# Altium PCB ESP32Break_PCB.PcbDoc
Units mil, origin at the board's own origin, x right, y up, seen from the top; angles counter-clockwise.
Board outline 1100 x 1300 mil, 2 copper layers (Top Layer, Bottom Layer); 12 components, 19 nets, 75 pads, 9 vias.
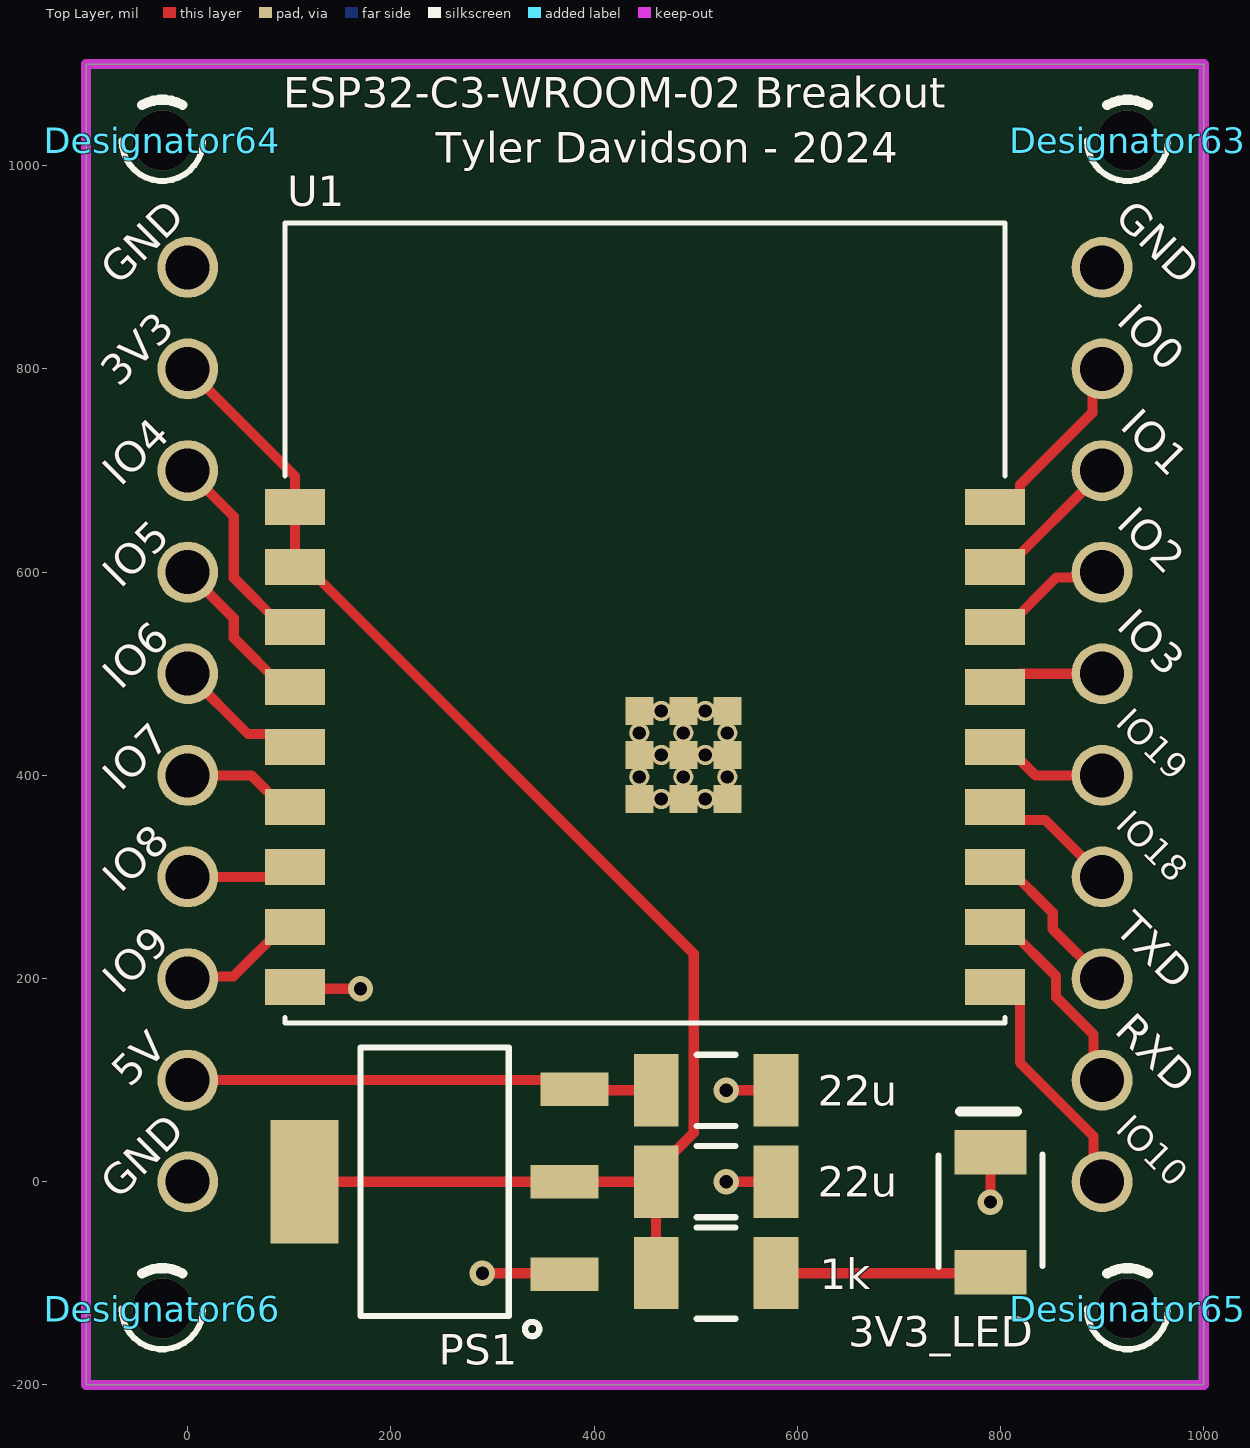
[diagram p0: Top Layer view]
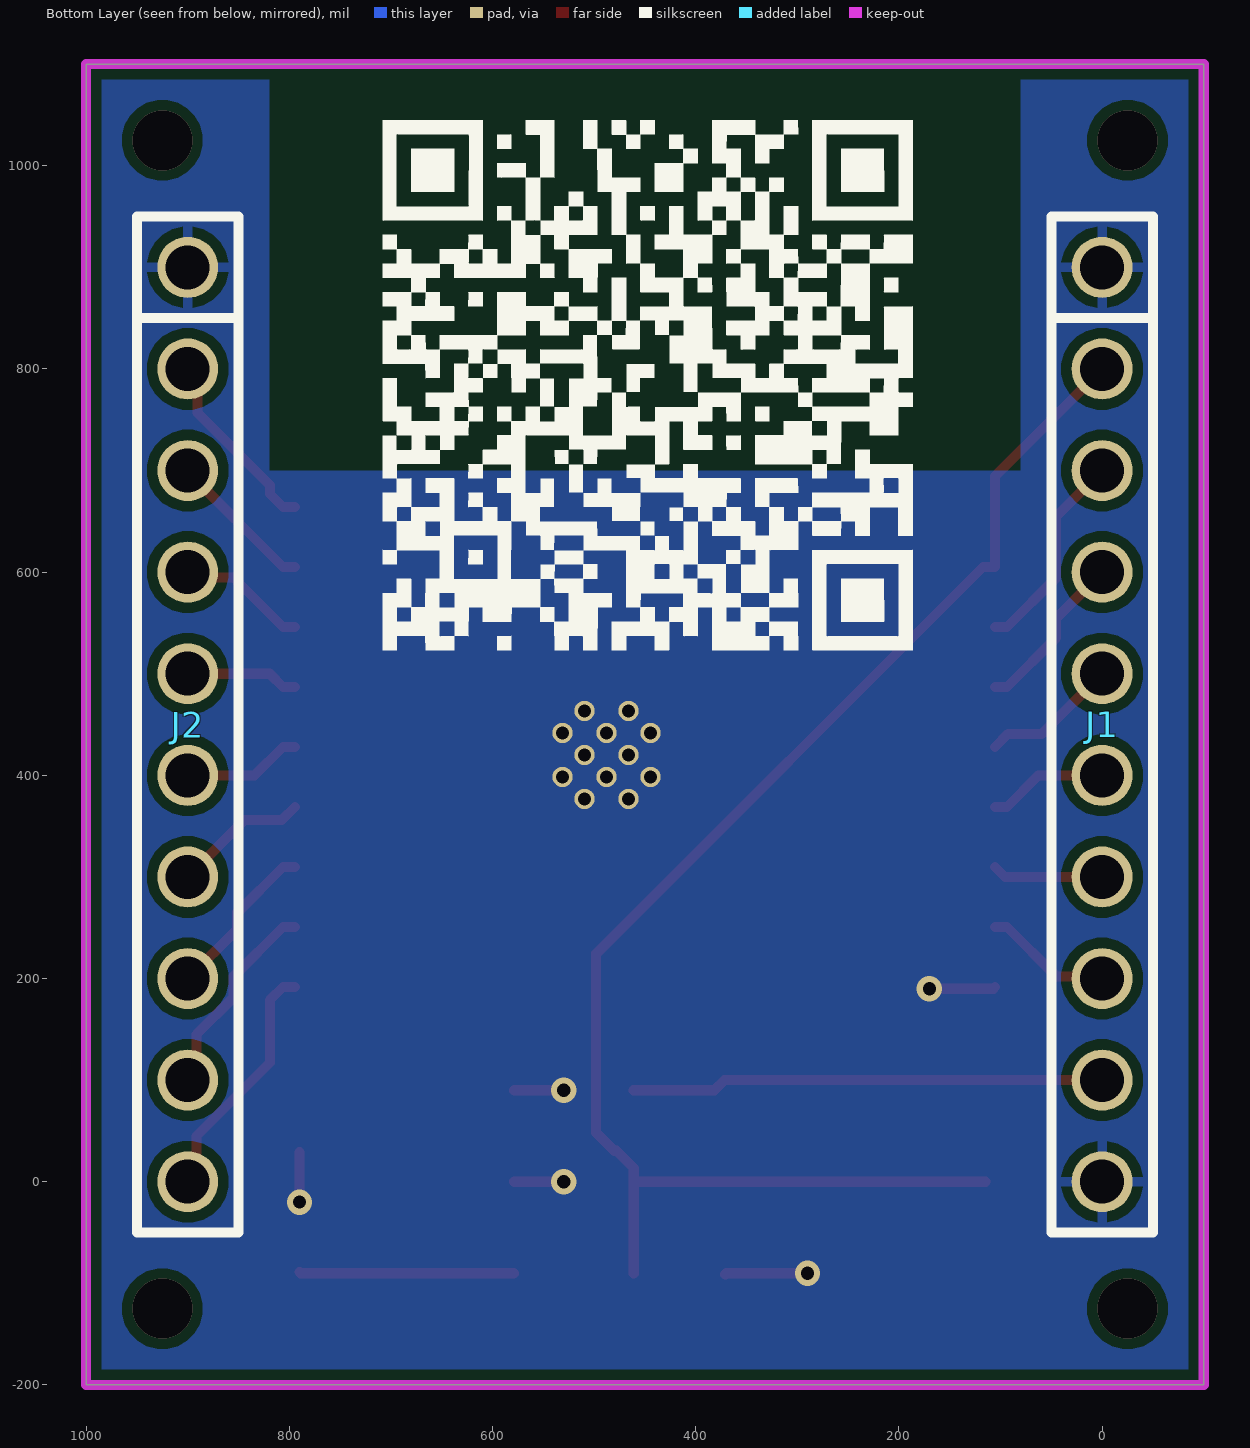
[diagram p1: Bottom Layer view, seen from below]
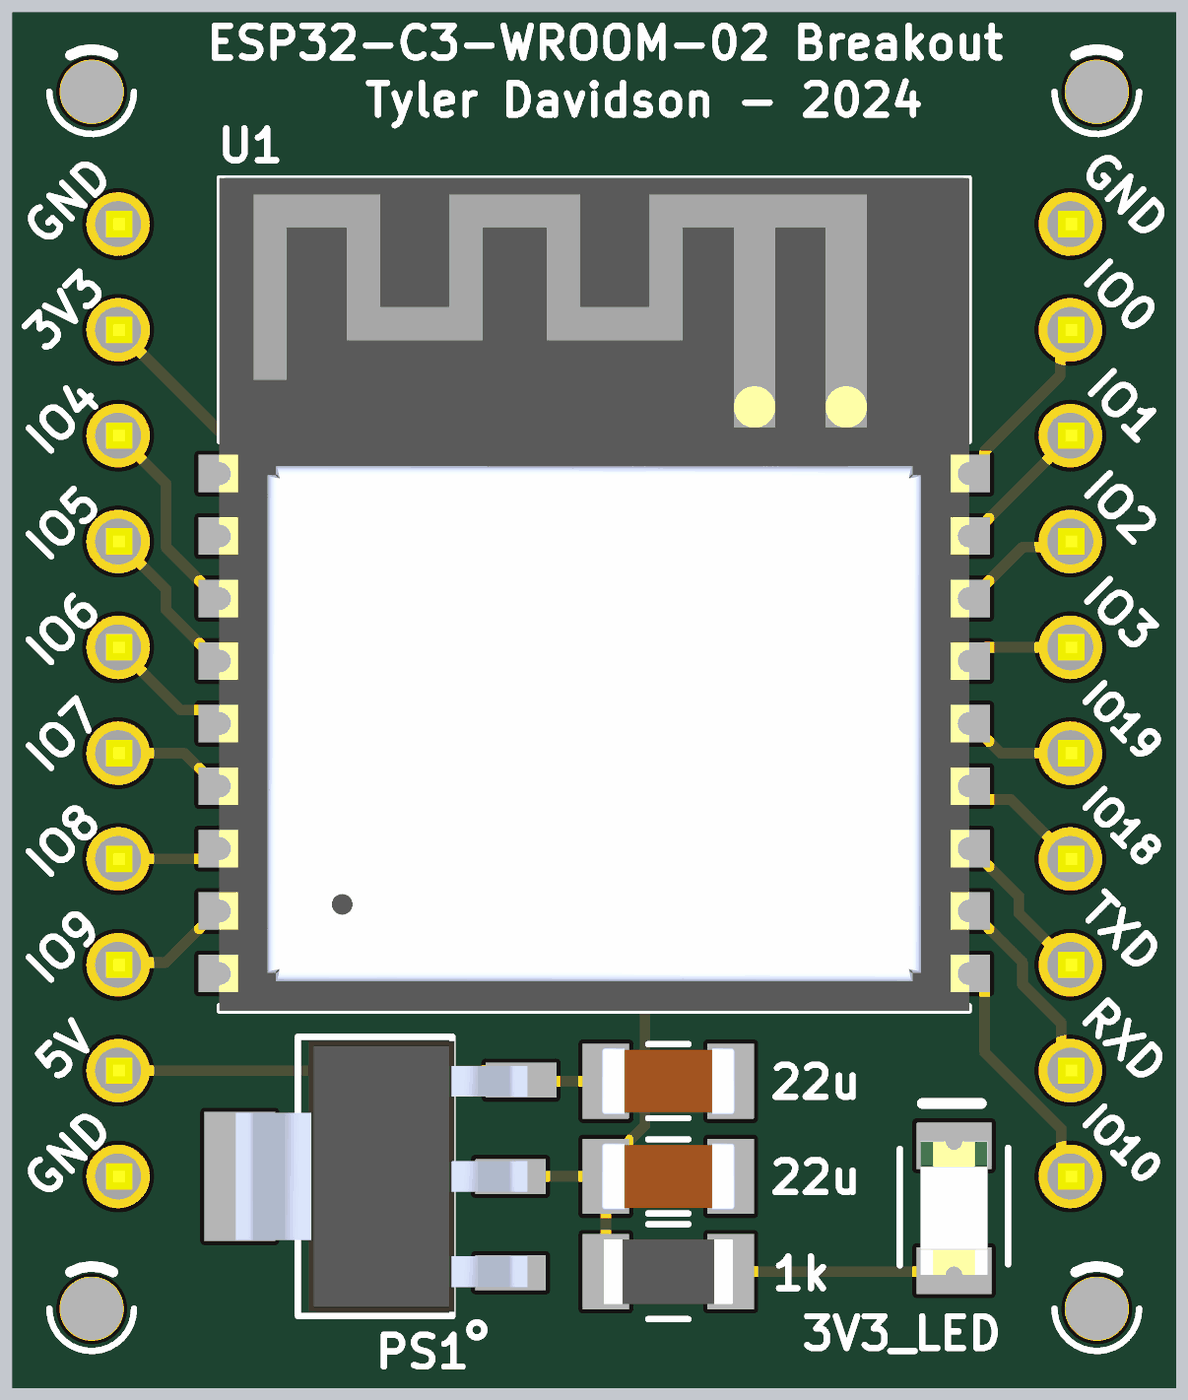
[diagram p2: 3D render of the assembled board from above, using the file's embedded part models]

## Layer stack, top to bottom
Top Solder: solder mask 0.4, Solder Resist, Dk 3.5
Top Layer: signal copper 1.4
Dielectric 1: dielectric 12.6, FR-4, Dk 4.8
Bottom Layer: signal copper 1.4
Bottom Solder: solder mask 0.4, Solder Resist, Dk 3.5

## Board outline
-100,-200 1000,-200 1000,1100 -100,1100

## Design rules (kind name [scope] priority, off if disabled: settings)
Clearance [All] p1: gap=10 ignorepadtopadclearanceinfootprint=FALSE except(0: Arc-Hole Track-Hole SMDPad-Hole THPad-Hole Via-Hole Fill-Hole Poly-Hole Region-Hole Text-Hole)
MinimumAnnularRing [All] p1: minimumring=10
PolygonConnect [All] p1: connectstyle=Relief reliefconductorwidth=10 reliefentries=4 polygonreliefangle="90 Angle" airgapwidth=10
RoutingVias [All] p1: holewidth=28 width=50 viastyle="Through Hole" minholewidth=28 minwidth=50 maxholewidth=28 maxwidth=50
SolderMaskExpansion [All] p1: expansion=4 istentingtop=FALSE
Width [All] p1: maxlimit=10 minlimit=10 preferedwidth=10
30 further rules are at their usual default settings.

## Classes and differential pairs
component class ESP32Break_Schem: 1k 3V3_LED 22u J1 J2 PS1 U1

## Components (designator, comment, footprint, x,y, rotation, side; value= is the part's Value field where it differs from the comment)
1k "1k" 1206_Passive_Resitor 520,-90 r180 top value="1K Ohm" (schematic designator R1)
3V3_LED "Red" LED_1206 790,-30 r90 top (schematic designator LED1)
22u "22uF" 1206_Passive_Capacitor 520,90 r0 top (schematic designator C2)
22u "22uF" 1206_Passive_Capacitor 520,0 r0 top (schematic designator C1)
Designator63 "Comment" AlignmentHole_1.5mm 925,1025 r0 top
Designator64 "Comment" AlignmentHole_1.5mm -25,1025 r0 top
Designator65 "Comment" AlignmentHole_1.5mm 925,-125 r0 top
Designator66 "Comment" AlignmentHole_1.5mm -25,-125 r0 top
J1 "MALE 10PIN" 10_PIN_100MIL-Male 0,900 r270 bottom locked value=MALE
J2 "MALE 10PIN" 10_PIN_100MIL-Male 900,900 r270 bottom value=MALE
PS1 "AMS1117-3.3" LDO 242.95,0 r90 top value="IC REG LINEAR 3.3V 800MA SOT223"
U1 "ESP32-C3-WROOM-02-H4" MODULE_ESP32-C3-WROOM-02-H4 450,550 r0 top

## Footprints (in the part's own frame and the unit in brackets; to place one, negate y for a bottom-side part, rotate by r counter-clockwise, add the part's x,y. Pads: shape width x height; smd on the part's side, far side on the other; paste and mask are expansions set on the pad)
10_PIN_100MIL-Male [mil]
  round 60 hole 43.31: 1(0,0) 2(100,0) 3(200,0) 4(300,0) 5(400,0) 6(500,0) 7(600,0) 8(700,0) 9(800,0) 10(900,0)
  silkscreen extent -50,-50 950,50, body extent -50,-50 950,48, height 330
1206_Passive_Capacitor [mil]
  rect 44x71 smd: 1(-59,0) 2(59,0)
  silkscreen extent -19,-35 19,35, body extent -63,-31 63,32, height 50
1206_Passive_Resitor [mil]
  rect 44x71 smd: 1(-59,0) 2(59,0)
  silkscreen extent -19,-45 19,45, body extent -61,-31 61,31, height 26
AlignmentHole_1.5mm [mm]
  round 1.5 on Top Paste mask+0: 1(0,0)
  silkscreen extent -1.02,-1.01 1.02,1.01
LDO [mm]
  rect 0.838x1.7 smd: 1(-2.311,-3.25) 2(0,-3.25) 3(2.311,-3.5)
  rect 3.099x1.7 smd: 4(0,3.25)
  silkscreen extent -3.86,-2.62 3.35,1.85, body extent -3.25,-3.65 3.25,3.35, height 1.85
LED_1206 [mil]
  rect 44x71 smd: 1(-59,0) 2(59,0)
  silkscreen extent -54,-51 99,51, body extent -63,-31 63,31, height 28
MODULE_ESP32-C3-WROOM-02-H4 [mm]
  rect 1.5x0.9 smd: 1(-8.75,2.9) 2(-8.75,1.4) 3(-8.75,-0.1) 4(-8.75,-1.6) 5(-8.75,-3.1) 6(-8.75,-4.6) 7(-8.75,-6.1) 8(-8.75,-7.6) 9(-8.75,-9.1) 10(8.75,-9.1) 11(8.75,-7.6) 12(8.75,-6.1) 13(8.75,-4.6) 14(8.75,-3.1) 15(8.75,-1.6) 16(8.75,-0.1) 17(8.75,1.4) 18(8.75,2.9)
  rect 0.7x0.7 smd: 19(-0.14,-2.2) 20(0.96,-2.2) 21(2.06,-2.2) 22(-0.14,-3.3) 23(0.96,-3.3) 24(2.06,-3.3) 25(-0.14,-4.4) 26(0.96,-4.4) 27(2.06,-4.4)
  round 0.508 hole 0.33 mask+0: 28(0.41,-2.2) 29(1.51,-2.2) 30(-0.14,-2.75) 31(0.96,-2.75) 32(2.06,-2.75) 33(0.41,-3.3) 34(1.51,-3.3) 35(-0.14,-3.85) 36(0.96,-3.85) 37(2.06,-3.85) 38(0.41,-4.4) 39(1.51,-4.4)
  silkscreen extent -9,-10 9,10, body extent -9,-10 9,10, height 3.35

## Part data
1k: library part R_1K_1206, "CHIP RESISTOR - SURFACE MOUNT 1KOHMS ±1% 1/4W 1206 ROHS", LCSC Part#=C4410, MFR Part #=RNCP1206FTD1K00CT, Digikey Link=https://www.digikey.com/product-detail/en/RNCP1206FTD1K00/RNCP1206FTD1K00CT-ND/2240675/?itemSeq=304982373, Type=Basic
3V3_LED: library part LED_RED_1206, "Red 621~631nm 1206 Light Emitting Diodes (LED) RoHS", LCSC Part#=C93133, MFR Part #=15-21/R6C-FQ1R1B/2T, Datasheet=https://datasheet.lcsc.com/szlcsc/1811151241_Everlight-Elec-15-21-R6C-FQ1R1B-2T_C93133.pdf, Type=Extended
22u 22u: library part C_22uF_1206, "22uF ±10% 25V X5R 1206 Multilayer Ceramic Capacitors MLCC - SMD/SMT RoHS", LCSC Part#=C12891, MFR Part #=CL31A226KAHNNNE, Datasheet=https://datasheet.lcsc.com/lcsc/1811031514_Samsung-Electro-Mechanics-CL31A226KAHNNNE_C12891.pdf, Type=basic
J1 J2: library part JM_10_PIN_MALE, "Pin Header 10 1 Straight ，180degrees 2.54mm Through Hole,P=2.54mm Pin Header & Female Header RoHS", LCSC Part#=C124372, Datasheet=https://datasheet.lcsc.com/szlcsc/1810241611_Ckmtw-Shenzhen-Cankemeng-C124372_C124372.pdf, Type=Extended
PS1: library part PS_AMS_LDO_3v3, "LOW DROPOUT REGULATORS(LDO) POSITIVE FIXED 1.3V @ 800MA 15V 3.3V 1A SOT-223 ROHS", LCSC Part#=C6186, MFR Part #=AMS1117-3.3, Type=Basic
U1: "WiFi Modules (802.11) (Engineering Samples) SMD module, ESP32-C3, 4MB SPI flash, PCB antenna, -40 C +105 C", Package=Package, Availability="In Stock", Check_prices=https://www.snapeda.com/parts/ESP32-C3-WROOM-02-H4/Espressif+Systems/view-part/?ref=eda, MF="Espressif Systems", MP=ESP32-C3-WROOM-02-H4, Price=None, Purchase-URL=https://pricing.snapeda.com/search/part/ESP32-C3-WROOM-02-H4/?ref=eda, SnapEDA_Link=https://www.snapeda.com/parts/ESP32-C3-WROOM-02-H4/Espressif+Systems/view-part/?ref=snap

## Via types
v1: diameter 25, hole 13, Top Layer to Bottom Layer, 5 vias
v2: diameter 59.06, hole 59.06, Top Layer to Bottom Layer, 4 vias

## Nets (pads, with @x,y where several pads share a name; then routed paths per layer and width w, separated by ;. In a path a pad name is that pad's centre, name@x,y a point inside that pad or via, vN(x,y) a via of type N, cw(c..) or ccw(c..) an arc to the next point about the centre after c; other vN are vias at no path point)
3V3: 1k.2 22u.1@461,0 J1.2 PS1.2 PS1.4 U1.1 U1.2 | length 1465.8
  Top Layer w10: J1.2 105.51,694.49 U1.1 U1.2 117.32,605.12 498,224.44 498,48.29 480.21,30.5 478,30.5 461,13.5 22u.1@461,0 ; PS1.4 PS1.2 22u.1@461,0 ; 1k.2 22u.1@461,0
5V: 22u.1@461,90 J1.9 PS1.3 | length 465.1
  Top Layer w10: J1.9 371.75,100 PS1.3 381.75,90 22u.1@461,90
GND: 3V3_LED.2 22u.2 J1.1 J1.10 J2.1 PS1.1 U1.9 U1.19 U1.20 U1.21 U1.22 U1.23 U1.24 U1.25 U1.26 U1.27 U1.28 U1.29 U1.30 U1.31 U1.32 U1.33 U1.34 U1.35 U1.36 U1.37 U1.38 U1.39 | length 293.5
  Top Layer w10: U1.9 107.24,190 v1(170,190) ; v1(290,-90) 369.91,-90 PS1.1 ; v1(530,0) 22u.2@579,0 ; v1(530,90) 22u.2@579,90 ; v1(790,-20) 3V3_LED.2
IO0: J2.2 U1.18 | length 186.4
  Top Layer w10: U1.18 806.3,664.17 819.02,676.89 819.02,685.49 890.43,756.9 890.43,790.43 J2.2
IO1: J2.3 U1.17 | length 145.5
  Top Layer w10: U1.17 806.3,605.12 900,698.82 J2.3
IO2: J2.4 U1.16 | length 127.9
  Top Layer w10: U1.16 806.3,546.06 855,594.76 894.76,594.76 J2.4
IO3: J2.5 U1.15 | length 110.9
  Top Layer w10: U1.15 806.3,487.01 819.29,500 J2.5
IO4: J1.3 U1.3 | length 204.6
  Top Layer w10: J1.3 45.28,654.72 45.28,594.49 93.7,546.06 U1.3
IO5: J1.4 U1.4 | length 163.6
  Top Layer w10: J1.4 45.28,554.72 45.28,535.43 93.7,487.01 U1.4
IO6: J1.5 U1.5 | length 135.4
  Top Layer w10: J1.5 59.33,440.67 92.8,440.67 U1.5
IO7: J1.6 U1.6 | length 118.4
  Top Layer w10: J1.6 62.6,400 93.7,368.9 U1.6
IO8: J1.7 U1.7 | length 109.6
  Top Layer w10: J1.7 95.67,300 U1.7
IO9: J1.8 U1.8 | length 126.5
  Top Layer w10: J1.8 2.09,202.09 45,202.09 93.7,250.79 U1.8
IO10: J2.10 U1.10 | length 242.4
  Top Layer w10: U1.10 806.3,191.73 819.02,179.02 819.02,117.34 891.36,45 891.36,8.64 J2.10
IO18: J2.7 U1.13 | length 134.1
  Top Layer w10: U1.13 807.2,356.18 843.82,356.18 J2.7
IO19: J2.6 U1.14 | length 117.1
  Top Layer w10: U1.14 806.3,427.95 834.25,400 J2.6
NetLED1_1: 1k.1 3V3_LED.1 | length 211.4
  Top Layer w10: 1k.1 789,-90 3V3_LED.1
RXD: J2.9 U1.11 | length 201.4
  Top Layer w10: U1.11 806.3,250.79 854.72,202.36 854.72,181.64 891.36,145 891.36,108.64 J2.9
TXD: J2.8 U1.12 | length 160.5
  Top Layer w10: U1.12 806.3,309.84 851.34,264.8 851.34,248.66 J2.8
pads on no net: Designator63.1 Designator64.1 Designator65.1 Designator66.1
copper on no net:
  other v2: -25,-125 925,-125 -25,1025 925,1025

## Polygon pours and split planes (outlines as drawn)
GND on Bottom Layer "GND_L02_P000" (solid, pour order 0): -100,1100 1000,1100 1000,-200 -100,-200

## Keep-outs
Keep-Out Layer:
  the board outline again, w10

## Other copper
Bottom Layer:
  pour cut-out: 80,1100 820,1100 820,700 80,700

## Silkscreen, mask and mechanical layers (free items; w line width, h text height)
Top Overlay:
  text "ESP32-C3-WROOM-02 Breakout" at 94.25,1057 h30
  text "Tyler Davidson - 2024" at 244.2,1003 h30
  text "GND" at 911.12,947.67 h30 r315
  text "GND" at -67.67,881.12 h30 r45
  text "IO0" at 912.89,845.9 h30 r315
  text "3V3" at -67.67,781.12 h30 r45
  text "IO1" at 916.42,742.37 h30 r315
  text "IO4" at -65.9,682.89 h30 r45
  text "IO2" at 912.89,645.9 h30 r315
  text "IO5" at -65.9,582.89 h30 r45
  text "IO3" at 912.89,545.9 h30 r315
  text "IO6" at -65.9,482.89 h30 r45
  text "IO19" at 911.71,450.62 h25 r315
  text "IO7" at -65.9,382.89 h30 r45
  text "IO18" at 911.71,350.62 h25 r315
  text "IO8" at -65.9,282.89 h30 r45
  text "TXD" at 911.12,247.67 h30 r315
  text "IO9" at -65.9,182.89 h30 r45
  text "RXD" at 911.12,147.67 h30 r315
  text "5V" at -57.07,91.72 h30 r45
  text "IO10" at 911.71,50.62 h25 r315
  text "GND" at -67.67,-18.88 h30 r45
Bottom Overlay:
  drawing of 30 lines, arcs and shapes, not listed